# Altium PCB PCB_S.PcbDoc (part 2 of 2)
Units mm, origin at the board's own origin, x right, y up, seen from the top; angles counter-clockwise.
Board outline 160 x 80 mm, 4 copper layers (Top Layer, Layer 1, Layer 2, Bottom Layer), stack 0.603 mm thick; 122 components, 76 nets, 483 pads, 356 vias.
Unrouted connection lines stored in the file: 12.
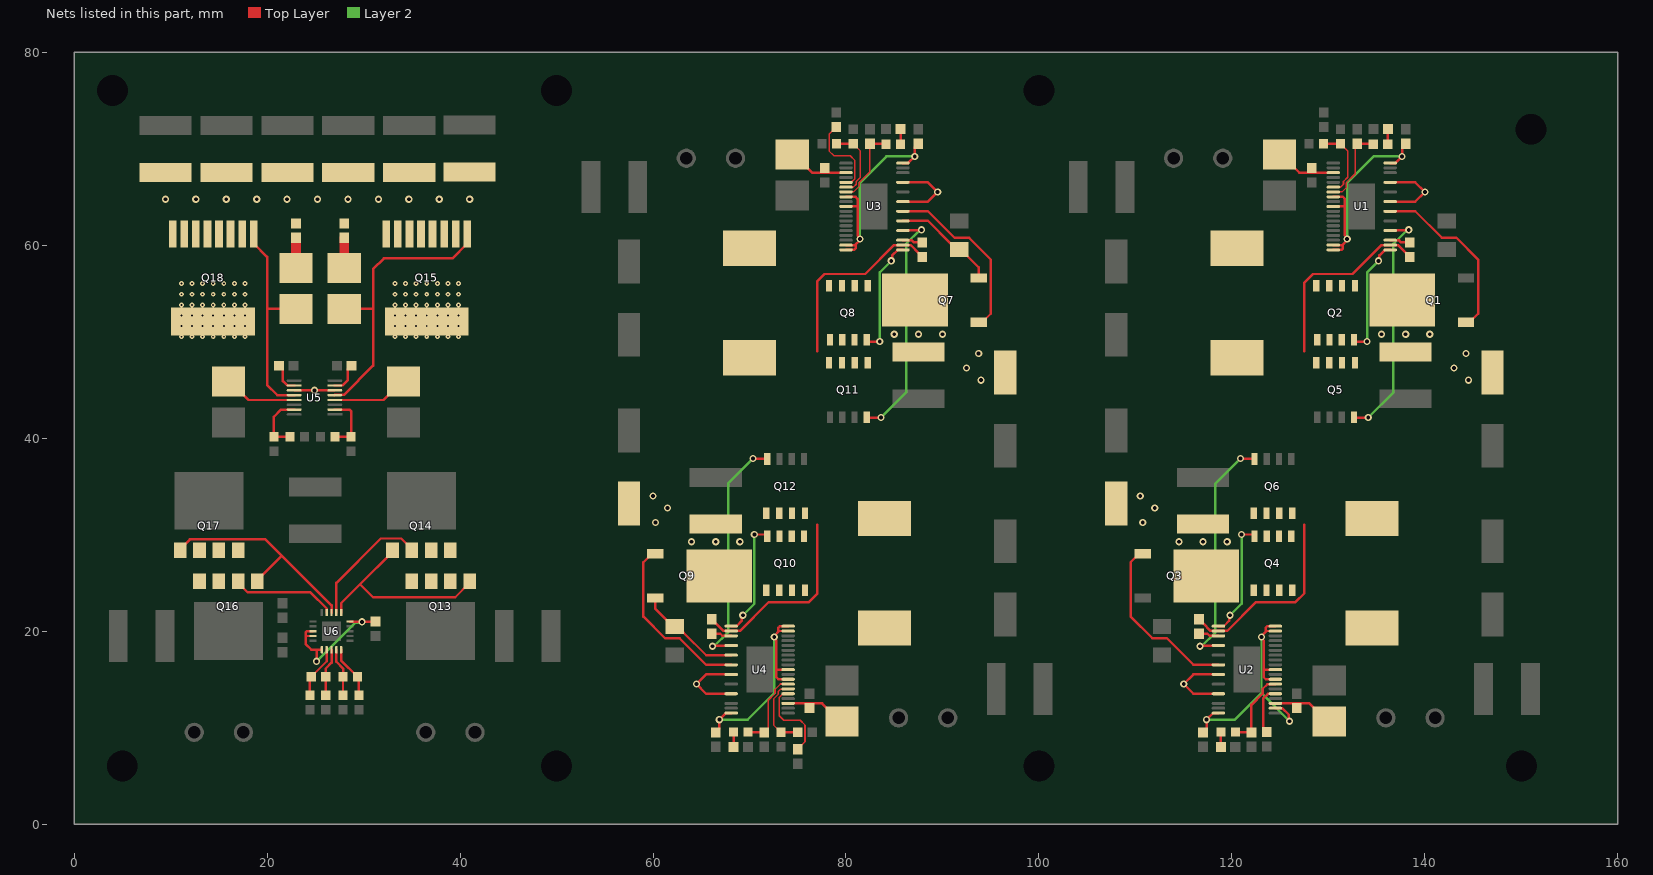
[diagram p4: the nets of this part, all layers, seen from the top]

## Via types
v1: diameter 0.75, hole 0.4, Top Layer to Bottom Layer, tented both sides, 240 vias
v2: diameter 0.5, hole 0.2, Top Layer to Bottom Layer, tented both sides, 116 vias

## Nets (pads, with @x,y where several pads share a name; then routed paths per layer and width w, separated by ;. In a path a pad name is that pad's centre, name@x,y a point inside that pad or via, vN(x,y) a via of type N, cw(c..) or ccw(c..) an arc to the next point about the centre after c; other vN are vias at no path point) (continued)
NetC6_1: C6.1 L1.1 Q2.S Q5.D U1.21 | length 20.1
  Top Layer w0.254: 127.5,49 127.5,56.099 128.401,57 132.5,57 135.488,59.988 136.388,59.988 U1.21@136.4,60 136.412,59.988 137.207,59.988 138.019,59.176 138.044,59.176 138.28,58.941 C6.1@138.417,58.803
NetC6_2: C6.2 U1.22 | length 2.3
  Top Layer w0.254: U1.22@136.4,60.5 136.412,60.488 137.326,60.488 137.536,60.278 C6.2@138.417,60.278 ; C6.2@138.417,60.253 C6.2@138.417,60.278 ; C6.2@138.567,60.128 C6.2@138.417,60.278
NetC7_2: C7.2 R2.1 | length 1.6
  Top Layer w0.254: R2.1@136.143,70.451 136.155,70.463 C7.2@136.155,72.026
NetC8_1: C8.1 U2.5 | length 5.1
  Top Layer w0.254: C8.1@123.6,9.525 123.232,9.893 123.232,13.002 123.718,13.488 124.488,13.488 U2.5@124.5,13.5
NetC9_1: C9.1 L2.1 Q4.S Q6.D U2.21 | length 20.1
  Top Layer w0.254: C9.1@116.583,21.222 116.583,21.197 116.72,21.059 116.956,20.824 116.981,20.824 117.793,20.012 118.588,20.012 U2.21@118.6,20 118.612,20.012 119.512,20.012 122.5,23 126.586,23 127.5,23.914 127.5,31
NetC9_2: C9.2 U2.22 | length 2.3
  Top Layer w0.254: C9.2@116.433,19.872 C9.2@116.583,19.722 117.464,19.722 117.674,19.512 118.588,19.512 U2.22@118.6,19.5
NetC11_2: C11.2 R4.1 | length 1.6
  Top Layer w0.254: C11.2@118.845,7.974 118.845,9.537 R4.1@118.857,9.549
NetC12_2: C12.2 R2.2 U1.7 | length 8.2
  Top Layer w0.16: U1.7@130.5,65.5 131.406,65.5 131.86,65.954 131.86,66.469 132.78,67.389 132.78,70.301 C12.2@132.98,70.501
  Top Layer w0.254: C12.2@132.98,70.501 134.593,70.501 R2.2@134.643,70.451
NetC14_2: C14.2 R4.2 U2.7 | length 8.2
  Top Layer w0.254: R4.2@120.357,9.549 120.407,9.499 C14.2@122.02,9.499 ; C14.2@122.02,9.524 122.02,12.348 123.187,13.514 123.187,13.844 123.187,14.012 123.663,14.488 124.488,14.488 U2.7@124.5,14.5
NetC15_2: C15.2 L1.2 R1.1 U1.3 | length 6.4
  Top Layer w0.254: R1.1@124.925,69.375 125.1,69.375 126.975,67.5 U1.3@130.5,67.5
NetC16_2: C16.2 L2.2 R3.1 U2.3 | length 6.4
  Top Layer w0.254: U2.3@124.5,12.5 128.025,12.5 129.9,10.625 R3.1@130.075,10.625
NetC17_2: C17.2 U1.8 U1.10 U1.18 U1.19 U1.38 | length 25.6
  Top Layer w0.254: U1.19@130.5,59.5 131.351,59.5 131.5,59.649 131.5,60 U1.18@130.5,60 ; U1.10@130.5,64 131.711,64 ; U1.8@130.5,65 131.5,65 131.711,64.789 131.711,64 ; 131.439,60 131.939,60.5 131.939,60.764 131.711,60.991 131.711,64 ; U1.38@136.4,68.5 136.943,68.5 v1(137.627,69.184) 137.627,70.127 C17.2@138,70.5
  Layer 2 w0.254: v1(131.939,60.63) 131.939,66.438 134.684,69.184 v1(137.627,69.184)
NetC18_2: C18.2 U2.2 U2.8 U2.10 U2.18 U2.19 U2.38 | length 32.1
  Top Layer w0.254: C18.2@117,9.5 117.373,9.873 v1(117.373,10.816) 118.057,11.5 U2.38@118.6,11.5 ; 123.561,20 123.061,19.5 123.061,19.236 123.289,19.009 123.289,16 ; U2.2@124.5,12 124.512,11.988 125.237,11.988 125.88,11.345 125.88,10.745 v1(125.975,10.65) ; U2.8@124.5,15 123.5,15 123.289,15.211 123.289,16 ; U2.10@124.5,16 123.289,16 ; U2.18@124.5,20 123.5,20 123.5,20.351 123.649,20.5 U2.19@124.5,20.5
  Layer 2 w0.254: v1(117.373,10.816) 120.316,10.816 123.061,13.561 ; v1(123.061,19.37) 123.061,13.561 ; v1(125.975,10.65) v1(125.975,10.65) 123.061,13.561
NetC20_2: C20.2 Q7.3 U3.26 | length 11
  Top Layer w0.254: U3.26@85.9,62.5 85.912,62.512 86.497,62.512 86.503,62.517 88.483,62.517 90.825,60.175 91.275,60.175 93.75,57.7 Q7.3@93.75,56.58
NetC21_1: C21.1 U3.5 | length 8.9
  Top Layer w0.16: C21.1@79,72.25 79,72.225 78.25,71.475 78.25,69.75 78.75,69.25 80.443,69.25 80.924,68.77 80.924,66.881 80.543,66.5 U3.5@80,66.5
NetC23_1: C23.1 L3.1 Q8.S Q11.D U3.21 | length 20.4
  Top Layer w0.254: 77,49 77,56.23 77.77,57 82,57 84.988,59.988 85.888,59.988 U3.21@85.9,60 85.912,59.988 86.707,59.988 87.519,59.176 87.544,59.176 87.917,58.803 C23.1@87.917,58.778 C23.1@87.767,58.928
NetC23_2: C23.2 U3.22 | length 2.1
  Top Layer w0.254: U3.22@85.9,60.5 85.912,60.488 86.826,60.488 87.036,60.278 C23.2@87.917,60.278
NetC24_2: C24.2 Q9.3 U4.26 | length 11
  Top Layer w0.254: Q9.3@60.25,23.42 60.25,22.3 62.725,19.825 63.175,19.825 65.517,17.483 67.497,17.483 67.503,17.488 68.088,17.488 U4.26@68.1,17.5
NetC25_2: C25.2 R8.1 | length 1.6
  Top Layer w0.254: R8.1@85.643,70.451 85.655,70.463 C25.2@85.655,72.026
NetC27_1: C27.1 U4.5 | length 8.9
  Top Layer w0.16: U4.5@74,13.5 73.457,13.5 73.076,13.119 73.076,11.23 73.557,10.75 75.25,10.75 75.75,10.25 75.75,8.525 75,7.775 C27.1@75,7.75
NetC28_2: C28.2 R8.2 U3.7 | length 8.2
  Top Layer w0.16: U3.7@80,65.5 80.786,65.5 81.36,66.074 81.36,66.186 81.36,66.466 81.489,66.595 82.48,67.586 C28.2@82.48,70.501
  Top Layer w0.254: C28.2@82.48,70.501 84.093,70.501 R8.2@84.143,70.451
NetC29_1: C29.1 L4.1 Q10.S Q12.D U4.21 | length 20.4
  Top Layer w0.254: C29.1@66.233,21.072 C29.1@66.083,21.222 66.083,21.197 66.456,20.824 66.481,20.824 67.293,20.012 68.088,20.012 U4.21@68.1,20 68.112,20.012 69.012,20.012 72,23 76.158,23 77,23.842 77,31
NetC29_2: C29.2 U4.22 | length 2.1
  Top Layer w0.254: C29.2@66.083,19.722 66.964,19.722 67.174,19.512 68.088,19.512 U4.22@68.1,19.5
NetC30_2: C30.2 R10.1 | length 1.6
  Top Layer w0.254: C30.2@68.345,7.974 68.345,9.537 R10.1@68.357,9.549
NetC32_2: C32.2 R10.2 U4.7 | length 8.2
  Top Layer w0.16: C32.2@71.52,9.499 71.94,9.919 71.94,12.834 72.64,13.534 72.64,13.944 73.205,14.51 73.99,14.51 U4.7@74,14.5
  Top Layer w0.254: R10.2@69.857,9.549 69.907,9.499 C32.2@71.52,9.499
NetC33_2: C33.2 L3.2 R7.1 U3.3 | length 6.4
  Top Layer w0.254: R7.1@74.425,69.375 74.6,69.375 76.475,67.5 U3.3@80,67.5
NetC34_2: C34.2 L4.2 R9.1 U4.3 | length 6.4
  Top Layer w0.254: U4.3@74,12.5 77.525,12.5 79.4,10.625 R9.1@79.575,10.625
NetC35_2: C35.2 U3.8 U3.10 U3.18 U3.19 U3.38 | length 25.6
  Top Layer w0.254: U3.19@80,59.5 80.851,59.5 81,59.649 81,60 U3.18@80,60 ; U3.10@80,64 81.211,64 ; U3.8@80,65 81,65 81.211,64.789 81.211,64 ; 80.939,60 81.439,60.5 81.439,60.764 81.211,60.991 81.211,64 ; U3.38@85.9,68.5 86.443,68.5 v1(87.127,69.184) 87.127,70.127 C35.2@87.5,70.5
  Layer 2 w0.254: v1(81.439,60.63) 81.439,66.438 84.184,69.184 v1(87.127,69.184)
NetC36_2: C36.2 U4.8 U4.10 U4.18 U4.19 U4.38 | length 25.6
  Top Layer w0.254: C36.2@66.5,9.5 66.873,9.873 v1(66.873,10.816) 67.557,11.5 U4.38@68.1,11.5 ; 73.061,20 72.561,19.5 72.561,19.236 72.789,19.009 72.789,16 ; U4.8@74,15 73,15 72.789,15.211 72.789,16 ; U4.10@74,16 72.789,16 ; U4.18@74,20 73,20 73,20.351 73.149,20.5 U4.19@74,20.5
  Layer 2 w0.254: v1(66.873,10.816) 69.816,10.816 72.561,13.561 v1(72.561,19.37)
NetC37_1: C37.1 R16.2 | length 3.1
  Top Layer w1: R16.2@28,57.625 C37.1@28,60.75
NetC41_1: C41.1 U5.7 | length 3.3
  Top Layer w0.254: U5.7@26.974,45.443 27.82,45.443 28.352,45.975 28.352,47.127 28.725,47.5 C41.1@28.75,47.5
NetC42_2: C42.2 U5.10 | length 3.2
  Top Layer w0.254: C42.2@21.25,47.5 21.275,47.5 21.648,47.127 21.648,45.902 22.107,45.443 U5.10@22.855,45.443
NetC44_1: C44.1 R24.2 | length 3.1
  Top Layer w1: R24.2@23,57.625 C44.1@23,60.75
NetC46_1: C46.1 U6.1 U6.10 U6.18 U6.19 | length 15
  Top Layer w0.254: U6.19@24.758,19.483 24.002,19.483 24,19.481 ; U6.18@24.758,19.983 24.756,19.985 24.149,19.985 24,19.836 24,19.481 ; v1(25.121,16.856) 25.137,16.872 25.137,18.058 ; U6.1@25.683,18.058 25.137,18.058 ; U6.10@28.608,20.983 31.239,20.983 C46.1@31.246,20.975 ; 24,19.481 24,18.649 24.591,18.058 25.137,18.058
  Layer 2 w0.254: v1(25.121,16.856) 29.112,20.846 29.726,20.846 v1(29.831,20.951)
NetQ1_1: Q1.1 U1.28 | length 18.4
  Top Layer w0.254: U1.28@136.4,63.5 139,63.5 141.75,60.75 143.25,60.75 145.5,58.5 145.5,52.875 144.625,52 Q1.1@144.25,52
NetQ2_G: Q2.G U1.20 | length 12.2
  Top Layer w0.254: Q2.G@132.655,50.175 132.83,50 v1(134,50) ; v1(135.191,58.363) 135.286,58.458 135.286,58.929 135.858,59.5 U1.20@136.4,59.5
  Layer 2 w0.254: v1(134,50) 134,57.172 v1(135.191,58.363)
NetQ3_1: Q3.1 U2.28 | length 18.4
  Top Layer w0.254: Q3.1@110.75,28 110.375,28 109.5,27.125 109.5,21.5 111.75,19.25 113.25,19.25 116,16.5 U2.28@118.6,16.5
NetQ4_G: Q4.G U2.20 | length 12.2
  Top Layer w0.254: U2.20@118.6,20.5 119.142,20.5 119.714,21.071 119.714,21.542 v1(119.809,21.637) ; v1(121,30) 122.17,30 Q4.G@122.345,29.825
  Layer 2 w0.254: v1(119.809,21.637) 121,22.828 v1(121,30)
NetQ5_G: Q5.G U1.24 | length 24.7
  Top Layer w0.254: Q5.G@132.655,42.175 132.705,42.125 v1(134.125,42.125) ; U1.24@136.4,61.5 136.412,61.512 138.262,61.512 v1(138.325,61.575)
  Layer 2 w0.254: v1(134.125,42.125) 136.725,44.725 136.725,60.138 138.162,61.575 v1(138.325,61.575)
NetQ6_G: Q6.G U2.24 | length 24.7
  Top Layer w0.254: v1(116.675,18.425) 116.738,18.488 118.588,18.488 U2.24@118.6,18.5 ; v1(120.875,37.875) 122.295,37.875 Q6.G@122.345,37.825
  Layer 2 w0.254: v1(116.675,18.425) 116.838,18.425 118.275,19.862 118.275,35.275 v1(120.875,37.875)
NetQ7_1: Q7.1 U3.28 | length 18.4
  Top Layer w0.254: U3.28@85.9,63.5 88.5,63.5 91.25,60.75 92.75,60.75 95,58.5 95,52.875 94.125,52 Q7.1@93.75,52
NetQ8_G: Q8.G U3.20 | length 12.2
  Top Layer w0.254: Q8.G@82.155,50.175 82.33,50 v1(83.5,50) ; v1(84.691,58.363) 84.786,58.458 84.786,58.929 85.358,59.5 U3.20@85.9,59.5
  Layer 2 w0.254: v1(83.5,50) 83.5,57.172 v1(84.691,58.363)
NetQ9_1: Q9.1 U4.28 | length 18.4
  Top Layer w0.254: Q9.1@60.25,28 59.875,28 59,27.125 59,21.5 61.25,19.25 62.75,19.25 65.5,16.5 U4.28@68.1,16.5
NetQ10_G: Q10.G U4.20 | length 12.2
  Top Layer w0.254: U4.20@68.1,20.5 68.642,20.5 69.214,21.071 69.214,21.542 v1(69.309,21.637) ; v1(70.5,30) 71.67,30 Q10.G@71.845,29.825
  Layer 2 w0.254: v1(69.309,21.637) 70.5,22.828 v1(70.5,30)
NetQ11_G: Q11.G U3.24 | length 24.7
  Top Layer w0.254: Q11.G@82.155,42.175 82.205,42.125 v1(83.625,42.125) ; U3.24@85.9,61.5 85.912,61.512 87.762,61.512 v1(87.825,61.575)
  Layer 2 w0.254: v1(83.625,42.125) 86.225,44.725 86.225,60.138 87.662,61.575 v1(87.825,61.575)
NetQ12_G: Q12.G U4.24 | length 24.7
  Top Layer w0.254: v1(66.175,18.425) 66.238,18.488 68.088,18.488 U4.24@68.1,18.5 ; v1(70.375,37.875) 71.795,37.875 Q12.G@71.845,37.825
  Layer 2 w0.254: v1(66.175,18.425) 66.338,18.425 67.775,19.862 67.775,35.275 v1(70.375,37.875)
NetQ13_G: Q13.G Q14.G U6.11 | length 21.3
  Top Layer w0.254: U6.11@27.683,21.908 27.683,22.883 29.65,24.85 ; Q14.G@33,28.35 33,28.2 29.65,24.85 ; Q13.G@41,25.15 41,25 39.5,23.5 31,23.5 29.65,24.85
NetQ13_S: Q13.S Q14.S U6.12 | length 13.4
  Top Layer w0.254: U6.12@27.183,21.908 27.183,24.985 31.787,29.59 33.91,29.59 35,28.5 Q14.S@35,28.35
NetQ15_D: Q15.D R15.2 U5.4 | length 8
  Top Layer w0.254: U5.4@26.974,43.943 32.072,43.943 33.975,45.846 R15.2@34.15,45.846
  other v2: 33.253,50.499 34.353,50.499 35.453,50.499 36.553,50.499 37.653,50.499 38.753,50.499 39.853,50.499 33.253,51.599 34.353,51.599 35.453,51.599 36.553,51.599 37.653,51.599 38.753,51.599 39.853,51.599 33.253,52.699 34.353,52.699 35.453,52.699 36.553,52.699 37.653,52.699 38.753,52.699 39.853,52.699 33.253,53.799 34.353,53.799 35.453,53.799 36.553,53.799 37.653,53.799 38.753,53.799 39.853,53.799 33.253,54.899 34.353,54.899 35.453,54.899 36.553,54.899 37.653,54.899 38.753,54.899 39.853,54.899 33.253,55.999 34.353,55.999 35.453,55.999 36.553,55.999 37.653,55.999 38.753,55.999 39.853,55.999
NetQ15_G: Q15.G R16.1 U5.5 | length 30
  Top Layer w0.254: U5.5@26.974,44.443 26.995,44.464 27.964,44.464 31,47.5 31,53.375 31,53.5 31,57.5 32.11,58.61 39.214,58.61 40.753,60.149 Q15.G@40.753,61.149 ; R16.1@28,53.375 30.875,53.375
NetQ16_G: Q16.G Q17.G U6.13 | length 23.5
  Top Layer w0.254: Q17.G@11,28.35 11,28.5 12,29.5 19.842,29.5 26.683,22.659 U6.13@26.683,21.908 ; Q16.G@19,25.15 19,25.3 21.487,27.787 21.528,27.787
NetQ16_S: Q16.S Q17.S U6.14 | length 10.9
  Top Layer w0.254: Q16.S@17,25.15 17,25 17.998,24.002 24.498,24.002 26.183,22.317 U6.14@26.183,21.908
NetQ18_D: Q18.D R23.2 U5.13 | length 7.6
  Top Layer w0.254: R23.2@16,45.846 16.175,45.846 18.078,43.943 U5.13@22.855,43.943
  other v2: 11.12,50.499 12.22,50.499 13.32,50.499 14.42,50.499 15.52,50.499 16.62,50.499 17.72,50.499 11.12,51.599 12.22,51.599 13.32,51.599 14.42,51.599 15.52,51.599 16.62,51.599 17.72,51.599 11.12,52.699 12.22,52.699 13.32,52.699 14.42,52.699 15.52,52.699 16.62,52.699 17.72,52.699 11.12,53.799 12.22,53.799 13.32,53.799 14.42,53.799 15.52,53.799 16.62,53.799 17.72,53.799 11.12,54.899 12.22,54.899 13.32,54.899 14.42,54.899 15.52,54.899 16.62,54.899 17.72,54.899 11.12,55.999 12.22,55.999 13.32,55.999 14.42,55.999 15.52,55.999 16.62,55.999 17.72,55.999
NetQ18_G: Q18.G R24.1 U5.12 | length 22.5
  Top Layer w0.254: Q18.G@18.62,61.149 18.62,60.149 20,58.769 20,45.5 21.057,44.443 U5.12@22.855,44.443 ; 20.009,53.341 20.043,53.375 R24.1@23,53.375
NetR5_1: R5.1 R6.2 U1.6 | length 7.6
  Top Layer w0.16: U1.6@130.5,66 130.517,66.017 131.267,66.017 131.56,66.31 131.56,66.593 132,67.033 132,69.75 R6.2@131.25,70.5
  Top Layer w0.254: R5.1@129.5,70.5 R6.2@131.25,70.5
NetR11_1: R11.1 R13.2 U3.6 | length 7.6
  Top Layer w0.16: U3.6@80,66 80.017,66.017 80.767,66.017 81.06,66.31 81.06,66.59 81.5,67.03 81.5,69.75 R13.2@80.75,70.5
  Top Layer w0.254: R11.1@79,70.5 R13.2@80.75,70.5
NetR12_2: R12.2 R14.2 U4.6 | length 7.6
  Top Layer w0.16: R14.2@73.25,9.5 72.5,10.25 72.5,12.967 73,13.467 73,13.75 73.233,13.983 73.983,13.983 U4.6@74,14
  Top Layer w0.254: R14.2@73.25,9.5 R12.2@75,9.5
NetR17_1: R17.1 R18.2 U5.2 | length 6.1
  Top Layer w0.254: U5.2@26.974,42.943 28.557,42.943 28.707,42.793 R18.2@28.707,40.129 R17.1@27.044,40.129
NetR19_2: R19.2 R21.2 U5.15 | length 6.2
  Top Layer w0.254: R21.2@22.369,40.129 R19.2@20.706,40.129 20.706,42.206 21.443,42.943 U5.15@22.855,42.943
NetR20_1: R20.1 R22.2 U6.2 | length 5.4
  Top Layer w0.254: R20.1@24.441,13.344 24.441,15.122 R22.2@24.58,15.261 26.183,16.864 U6.2@26.183,18.058
NetR22_1: R22.1 R25.2 U6.3 | length 5
  Top Layer w0.254: R25.2@26.092,13.344 26.092,15.249 R22.1@26.08,15.261 26.08,16.117 26.683,16.72 U6.3@26.683,18.058
NetR26_1: R26.1 R27.2 U6.4 | length 5
  Top Layer w0.254: U6.4@27.183,18.058 27.183,16.817 27.882,16.118 R27.2@27.882,15.261 27.87,15.249 R26.1@27.87,13.344
NetR27_1: R27.1 R28.2 U6.5 | length 5.5
  Top Layer w0.254: U6.5@27.683,18.058 27.683,16.96 R27.1@29.382,15.261 29.521,15.122 R28.2@29.521,13.344
PCB_PWR: C1.1 C3.1 C19.1 C22.1 C37.2 C44.2 C47.2 C48.2 C49.2 C50.2 C51.2 C52.2 C53.2 C54.2 C55.2 C56.2 Q1.2 Q2.D Q3.2 Q4.D Q7.2 Q8.D Q9.2 Q10.D Q15.S Q18.S U1.30 U1.34 U2.30 U2.34 U3.30 U3.34 U4.30 U4.34 U5.6 U5.11 | length 36.2
  Top Layer w0.254: U5.11@22.855,44.943 v1(24.915,44.943) U5.6@26.974,44.943 ; U4.34@68.1,13.5 65.5,13.5 v1(64.5,14.5) 65.5,15.5 U4.30@68.1,15.5 ; U3.30@85.9,64.5 88.5,64.5 v1(89.5,65.5) 88.5,66.5 U3.34@85.9,66.5 ; U2.34@118.6,13.5 116,13.5 v1(115,14.5) 116,15.5 U2.30@118.6,15.5 ; U1.30@136.4,64.5 139,64.5 v1(140,65.5) 139,66.5 U1.34@136.4,66.5
  other v1: 64,29.25 66.5,29.25 69,29.25 114.5,29.25 117,29.25 119.5,29.25 60.25,31.25 110.75,31.25 61.5,32.75 112,32.75 60,34 110.5,34 94,46 144.5,46 92.5,47.25 143,47.25 93.75,48.75 144.25,48.75 85,50.75 87.5,50.75 90,50.75 135.5,50.75 138,50.75 140.5,50.75 9.466,64.75 12.619,64.75 15.773,64.75 18.926,64.75 22.08,64.75 25.233,64.75 28.386,64.75 31.54,64.75 34.693,64.75 37.847,64.75 41,64.75
pads on no net: U1.2 U1.11 U1.13 U1.14 U1.36 U2.11 U2.13 U2.14 U2.36 U3.2 U3.11 U3.13 U3.14 U3.36 U4.2 U4.11 U4.13 U4.14 U4.36 U5.1 U5.16 U6.6 U6.7

## Polygon pours and split planes (outlines as drawn)
GND on Top Layer "GND_L01_P051" (solid, remove dead copper, pour order 51): 0,0 160,0 160,80 0,80
5V on Top Layer "5V_L01_P050" (solid, remove dead copper, pour order 50): 148.15,23.975 148.15,19.425 147.05,18.325 147.05,11.3 136.25,11.3 133.975,9.025 128.35,9.025 128.35,9.975 128.35,12.15 131.775,12.15 143.6,23.975 145.85,23.975
19V on Top Layer "19V_L01_P049" (solid, remove dead copper, pour order 49): 97.65,23.975 97.65,19.425 96.55,18.325 96.55,11.3 85.75,11.3 83.475,9.025 77.85,9.025 76.05,9.025 76.05,9.975 77.85,9.975 77.85,12.15 81.275,12.15 93.1,23.975 95.35,23.975
12V on Top Layer "12V_L01_P048" (solid, remove dead copper, pour order 48): 106.85,56.025 106.85,60.575 107.95,61.675 107.95,68.7 118.75,68.7 121.025,70.975 126.65,70.975 128.45,70.975 128.45,70.025 126.65,70.025 126.65,67.85 123.225,67.85 111.4,56.025 109.15,56.025
24V on Top Layer "24V_L01_P024" (solid, remove dead copper, pour order 24): 56.35,56.025 56.35,60.575 57.45,61.675 57.45,68.7 68.25,68.7 70.525,70.975 76.15,70.975 77.95,70.975 77.95,70.025 76.15,70.025 76.15,67.85 72.725,67.85 60.9,56.025 58.65,56.025
PCB_PWR on Top Layer "PCB_PWR_L01_P007" (solid, remove dead copper, pour order 7): 126.6,23.575 121.9,23.575 121.297,22.972 113.958,22.972 113.955,22.969 113.944,22.981 113.944,28.457 112,29.5 109.158,30.943 109.143,30.928 106.851,30.928 106.851,35.473 106.851,35.474 110.885,35.474 114.32,32.039 119.674,32.039 119.674,30.826 122.208,28.292 126.578,28.292 126.6,28.27
PCB_PWR on Top Layer "PCB_PWR_L01_P008" (solid, remove dead copper, pour order 8): 76.1,23.575 71.4,23.575 70.797,22.972 63.458,22.972 63.455,22.969 63.444,22.981 63.444,28.457 61.5,29.5 58.658,30.943 58.643,30.928 56.351,30.928 56.351,35.473 56.351,35.474 60.385,35.474 63.82,32.039 69.174,32.039 69.174,30.826 71.708,28.292 76.078,28.292 76.1,28.27
PCB_PWR on Top Layer "PCB_PWR_L01_P002" (solid, remove dead copper, pour order 2): 128.4,56.425 133.1,56.425 133.703,57.028 141.042,57.028 141.045,57.031 141.056,57.019 141.056,51.543 143,50.5 145.842,49.057 145.857,49.072 148.149,49.072 148.149,44.527 148.149,44.526 144.115,44.526 140.68,47.961 135.326,47.961 135.326,49.174 132.792,51.708 128.422,51.708 128.4,51.73
PCB_PWR on Top Layer "PCB_PWR_L01_P011" (solid, remove dead copper, pour order 11): 77.9,56.425 82.6,56.425 83.203,57.028 90.542,57.028 90.545,57.031 90.556,57.019 90.556,51.543 92.5,50.5 95.342,49.057 95.357,49.072 97.649,49.072 97.649,44.527 97.649,44.526 93.615,44.526 90.18,47.961 84.826,47.961 84.826,49.174 82.292,51.708 77.922,51.708 77.9,51.73
NetC34_2 on Top Layer "NETC34_2_L01_P047" (solid, remove dead copper, pour order 47): 86.775,22.125 86.775,18.525 81.575,13.325 77.875,13.325 77.875,16.425 79.15,16.425 81.275,18.55 81.275,22.125
NetC16_2 on Top Layer "NETC16_2_L01_P046" (solid, remove dead copper, pour order 46): 137.275,22.125 137.275,18.525 132.075,13.325 128.375,13.325 128.375,16.425 129.65,16.425 131.775,18.55 131.775,22.125
NetC33_2 on Top Layer "NETC33_2_L01_P017" (solid, remove dead copper, pour order 17): 67.225,57.875 67.225,61.475 72.7,66.675 76.15,66.675 76.15,63.575 74.85,63.575 72.725,61.45 72.725,57.875
CURRENT_LIMITER on Top Layer "CURRENT_LIMITER_L01_P016" (solid, remove dead copper, pour order 16): 17.55,30.5 21,33.95 27.675,33.95 27.7,33.975 31.175,30.5 39.55,30.5 39.575,30.525 39.575,39.45 35.919,43.106 29.175,43.106 29.175,39.65 26.574,39.65 26.574,40.606 22.825,40.6 22.825,39.65 20.244,39.65 20.244,43.106 14.231,43.106 10.425,39.3 10.425,30.5
BATTERY on Top Layer "BATTERY_L01_P034" (solid, remove dead copper, pour order 34): 34.45,22.975 42.825,22.975 43.625,22.175 45.525,22.175 45.525,16.825 37.325,8.625 34.4,8.625 34.45,8.675
CHARGER on Top Layer "CHARGER_L01_P033" (solid, remove dead copper, pour order 33): 19.55,22.975 11.175,22.975 10.375,22.175 8.475,22.175 8.475,16.825 16.675,8.625 19.6,8.625 19.55,8.675
NetQ13_S on Top Layer "NETQ13_S_L01_P023" (solid, remove dead copper, pour order 23): 39.65,24.35 39.65,27.55 39.65,29.15 34.35,29.15 34.35,24.35
NetQ16_S on Top Layer "NETQ16_S_L01_P022" (solid, remove dead copper, pour order 22): 12.35,29.15 12.35,25.95 12.35,24.35 17.65,24.35 17.65,29.15
NetC15_2 on Top Layer "NETC15_2_L01_P019" (solid, remove dead copper, pour order 19): 117.725,57.875 117.725,61.475 122.925,66.675 126.625,66.675 126.625,63.575 125.35,63.575 123.225,61.45 123.225,57.875
NetQ15_D on Top Layer "NETQ15_D_L01_P013" (solid, remove dead copper, pour order 13): 41.403,57.249 41.603,57.05 41.603,49.205 35.875,44.3 32.425,44.3 32.425,48.223 31.503,49.145 31.503,50.65 31.703,50.85 31.703,57.249
NetQ18_D on Top Layer "NETQ18_D_L01_P012" (solid, remove dead copper, pour order 12): 9.57,57.249 9.37,57.049 9.37,49.205 14.275,44.3 17.725,44.3 17.725,47.4 19.47,49.145 19.47,50.65 19.27,50.85 19.27,57.249
PCB_PWR on Top Layer "PCB_PWR_L01_P000" (solid, remove dead copper, pour order 0): 6.775,66.55 9.82,63.505 9.82,59.749 18.225,59.749 19.15,61.725 28.5,61.725 30.476,59.749 39.953,59.749 39.925,59.778 39.925,62.825 43.7,66.6 43.7,68.475 6.775,68.475
NetC9_1 on Top Layer "NETC9_1_L01_P006" (solid, remove dead copper, pour order 6): 137.25,29.85 131.75,29.85 126.6,29.225 123.3,29.225 123.3,30.425 121.9,31.575 121.9,36.27 126.6,36.27 131.75,33.5 137.25,33.5
NetC29_1 on Top Layer "NETC29_1_L01_P005" (solid, remove dead copper, pour order 5): 86.75,29.85 81.25,29.85 76.1,29.225 72.8,29.225 72.8,30.425 71.4,31.575 71.4,36.27 76.1,36.27 81.25,33.5 86.75,33.5
NetC23_1 on Top Layer "NETC23_1_L01_P004" (solid, remove dead copper, pour order 4): 67.25,50.15 72.75,50.15 77.9,50.775 81.2,50.775 81.2,49.575 82.6,48.425 82.6,43.73 77.9,43.73 72.75,46.5 67.25,46.5
NetC6_1 on Top Layer "NETC6_1_L01_P003" (solid, remove dead copper, pour order 3): 117.75,50.15 123.25,50.15 128.4,50.775 131.7,50.775 131.7,49.575 133.1,48.425 133.1,43.73 128.4,43.73 123.25,46.5 117.75,46.5
GND on Layer 2 "GND_L03_P071" (solid, pour order 71): 66.6,69.75 64.75,71.6 62.275,71.6 60.438,69.762 61.975,68.225 65.075,68.225
GND on Layer 2 "GND_L03_P070" (solid, pour order 70): 117.098,69.746 115.248,71.596 112.773,71.596 110.935,69.759 112.473,68.221 115.573,68.221
GND on Layer 2 "GND_L03_P069" (solid, pour order 69): 137.9,10.25 139.75,8.4 142.225,8.4 144.062,10.237 142.525,11.775 139.425,11.775
GND on Layer 2 "GND_L03_P068" (solid, pour order 68): 87.4,10.25 89.25,8.4 91.725,8.4 93.563,10.237 92.025,11.775 88.925,11.775
24V on Layer 2 "24V_L03_P063" (solid, pour order 63): 69.075,70.6 71.1,70.6 71.1,67.775 69.75,66.425 67.25,66.425 66.075,67.6
12V on Layer 2 "12V_L03_P062" (solid, pour order 62): 119.573,70.596 121.598,70.596 121.598,67.771 120.248,66.421 117.748,66.421 116.573,67.596
5V on Layer 2 "5V_L03_P061" (solid, pour order 61): 135.425,9.4 133.4,9.4 133.4,12.225 134.75,13.575 137.25,13.575 138.425,12.4
19V on Layer 2 "19V_L03_P060" (solid, pour order 60): 84.925,9.4 82.9,9.4 82.9,12.225 84.25,13.575 86.75,13.575 87.925,12.4
BATTERY on Layer 2 "BATTERY_L03_P054" (solid, remove dead copper, pour order 54): 33.962,10.887 35.175,12.1 37.75,12.1 38.937,10.912 36.437,8.412
CHARGER on Layer 2 "CHARGER_L03_P053" (solid, remove dead copper, pour order 53): 15.062,10.887 16.275,12.1 18.85,12.1 20.037,10.912 17.537,8.412
PCB_PWR on Layer 1 "PCB_PWR_L02_P067" (solid, remove dead copper, pour order 67): 6.778,68.487 7.792,69.5 148.19,69.5 148.19,30.762 127.466,10.5 59.05,10.5 6.791,62.758 6.791,68.471
GND on Layer 1 "GND_L02_P066" (solid, pour order 66): 66.6,69.75 64.75,71.6 62.275,71.6 60.438,69.762 61.975,68.225 65.075,68.225
GND on Layer 1 "GND_L02_P065" (solid, pour order 65): 117.098,69.746 115.248,71.596 112.773,71.596 110.935,69.759 112.473,68.221 115.573,68.221
GND on Layer 1 "GND_L02_P064" (solid, pour order 64): 137.9,10.25 139.75,8.4 142.225,8.4 144.062,10.237 142.525,11.775 139.425,11.775
GND on Layer 1 "GND_L02_P059" (solid, pour order 59): 87.4,10.25 89.25,8.4 91.725,8.4 93.563,10.237 92.025,11.775 88.925,11.775
24V on Layer 1 "24V_L02_P058" (solid, pour order 58): 69.075,70.6 71.1,70.6 71.1,67.775 69.75,66.425 67.25,66.425 66.075,67.6
12V on Layer 1 "12V_L02_P057" (solid, pour order 57): 119.573,70.596 121.598,70.596 121.598,67.771 120.248,66.421 117.748,66.421 116.573,67.596
5V on Layer 1 "5V_L02_P056" (solid, pour order 56): 135.425,9.4 133.4,9.4 133.4,12.225 134.75,13.575 137.25,13.575 138.425,12.4
19V on Layer 1 "19V_L02_P055" (solid, pour order 55): 84.925,9.4 82.9,9.4 82.9,12.225 84.25,13.575 86.75,13.575 87.925,12.4
BATTERY on Layer 1 "BATTERY_L02_P052" (solid, remove dead copper, pour order 52): 33.962,10.887 35.175,12.1 37.75,12.1 38.937,10.912 36.437,8.412
CHARGER on Layer 1 "CHARGER_L02_P044" (solid, remove dead copper, pour order 44): 15.062,10.887 16.275,12.1 18.85,12.1 20.037,10.912 17.537,8.412
GND on Bottom Layer "GND_L04_P045" (solid, remove dead copper, pour order 45): 0,0 160,0 160,80 0,80

## Keep-outs
Top Layer:
  lines w0.002: 9.72,57.508 9.72,59.649 ; 10.325,29.325 10.325,30.4 ; 11.75,27.45 12.236,27.45 ; 12.25,24.203 12.25,24.25 ; 14.175,43.191 14.175,44.247 ; 19.675,23.1 20.771,22.004 21.009,22.004 ; 19.931,29.714 19.931,32.728 ; 20.231,48.097 20.234,48.1 20.625,48.1 ; 22.209,18.677 23.741,18.677 23.769,18.649 ; 24.825,51.725 26.175,51.725 ; 25.016,12.769 25.517,12.769 ; 26.667,12.769 27.295,12.769 ; 28.445,12.769 28.946,12.769 ; 29.375,48.1 30.748,48.1 30.762,48.114 ; 31.085,30.437 31.699,29.823 31.699,29.804 ; 35.975,43.246 35.975,44.196 ; 39.675,29.325 39.675,30.4 ; 39.765,26.05 40.25,26.05 ; 41.253,57.508 41.253,59.649 ; 41.253,62.649 41.253,64.153 41.6,64.5 ; 41.75,24.158 41.75,24.25 ; 59.425,28.58 59.425,30.425 ; 66.525,61.475 67.117,61.475 ; 68.743,13.743 68.743,14.257 ; 68.743,14.743 68.743,15.257 ; 68.743,16.743 68.743,17.257 ; 68.743,17.743 68.743,18.257 ; 68.743,18.743 68.743,19.257 ; 69.3,32.15 71.217,32.15 ; 72.171,8.925 72.675,8.925 ; 73.028,18.222 73.267,18.222 ; 73.15,16.671 73.15,17.3 ; 73.825,8.925 73.825,8.924 74.372,8.377 ; 79.628,71.623 80.175,71.076 ; 80.733,61.778 80.972,61.778 ; 80.85,62.7 80.85,63.329 ; 81.325,71.075 81.829,71.075 ; 82.783,47.85 84.7,47.85 ; 85.257,60.743 85.257,61.257 ; 85.257,61.743 85.257,62.257 ; 85.257,62.743 85.257,63.257 ; 85.257,64.743 85.257,65.257 ; 85.257,65.743 85.257,66.257 ; 86.883,18.525 87.475,18.525 ; 94.575,49.575 94.575,51.42 ; 109.925,28.58 109.925,30.425 ; 117.054,61.475 117.55,61.472 ; 119.243,13.743 119.243,14.257 ; 119.243,14.743 119.243,15.257 ; 119.243,16.743 119.243,17.257 ; 119.243,17.743 119.243,18.257 ; 119.243,18.743 119.243,19.257 ; 119.8,32.15 121.717,32.15 ; 122.62,8.874 122.974,8.874 ; 123.528,18.222 123.767,18.222 ; 123.65,16.671 123.65,17.3 ; 124.744,10.272 125.681,10.272 125.706,10.247 ; 130.128,71.623 130.675,71.076 ; 131.233,61.778 131.472,61.778 ; 131.35,62.7 131.35,63.329 ; 131.825,71.075 132.329,71.075 ; 133.283,47.85 135.2,47.85 ; 135.757,60.743 135.757,61.257 ; 135.757,61.743 135.757,62.257 ; 135.757,62.743 135.757,63.257 ; 135.757,64.743 135.757,65.257 ; 135.757,65.743 135.757,66.257 ; 137.383,18.525 137.975,18.525 ; 145.075,49.575 145.075,51.42 ; 80.175,71.075 80.175,71.076 ; 130.675,71.075 130.675,71.076
Keep-Out Layer:
  circle w0.254: c100,76 r3
  circle w0.254: c50,76 r3
  circle w0.254: c4,76 r3
  circle w0.254: c5,6 r3
  circle w0.254: c50,6 r3
  circle w0.254: c100,6 r3
  circle w0.254: c150,6 r3
  circle w0.254: c151,72 r3
  lines w2: 0,0 0,80 160,80 160,0 0,0

## Silkscreen, mask and mechanical layers (free items; w line width, h text height)
Top Overlay:
  text "24V" at 77.246,75.246 h1.52 r180
  text "12V" at 127.744,75.242 h1.52 r180
  text "-" at 59.254,71.492 h1.52
  text "+" at 71.754,71.5 h1.52
  text "-" at 109.752,71.488 h1.52
  text "+" at 122.252,71.496 h1.52
  text "+" at 82.246,8.5 h1.52 r180
  text "-" at 94.746,8.508 h1.52 r180
  text "+" at 132.746,8.5 h1.52 r180
  text "-" at 145.246,8.508 h1.52 r180
  text "CHGR" at 20.754,7.754 h1.52
  text "BAT" at 29.254,7.754 h1.52
  text "-" at 8.254,7.008 h1.52 r180
  text "+" at 20.754,7 h1.52 r180
  text "+" at 33.246,7 h1.52 r180
  text "-" at 45.746,7.008 h1.52 r180
  text "19V" at 76.754,4.754 h1.52
  text "5V" at 127.254,4.754 h1.52
  text "Prio 1" at 10.254,1.254 h1.52
  text "Prio 2" at 33.754,1.254 h1.52
Outline:
  the board outline again, w1